# Altium PCB Copy of ADAM202303_FRONTDOOR.PcbDoc
Units mil, origin at the board's own origin, x right, y up, seen from the top; angles counter-clockwise.
Board outline 2480.32 x 2480.32 mil, 2 copper layers (Top Layer, Bottom Layer); 52 components, 39 nets, 181 pads, 44 vias.
Unrouted connection lines stored in the file: 1.
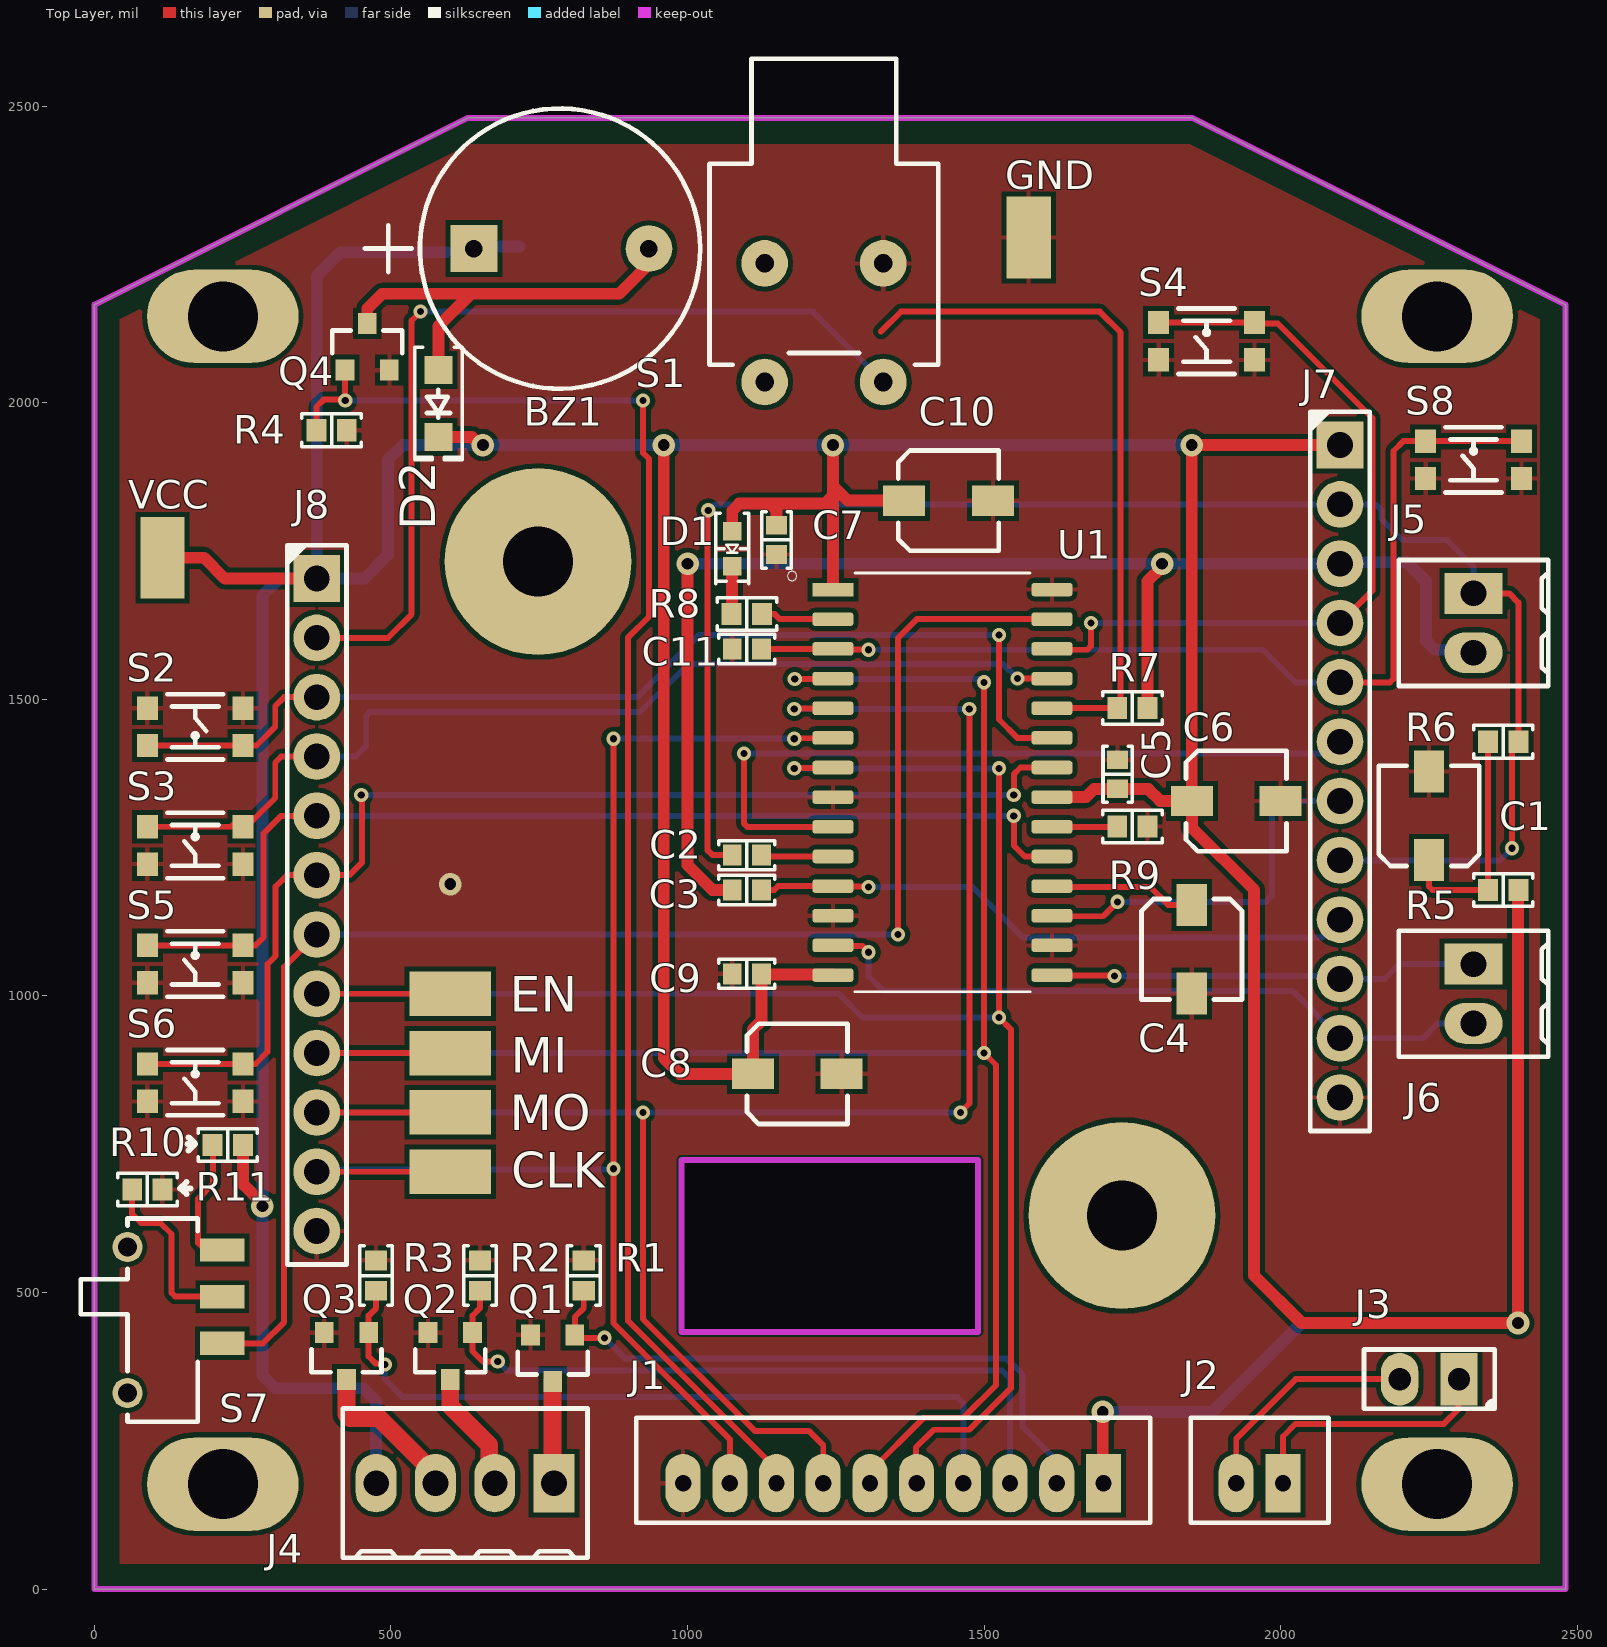
[diagram p0: Top Layer view]
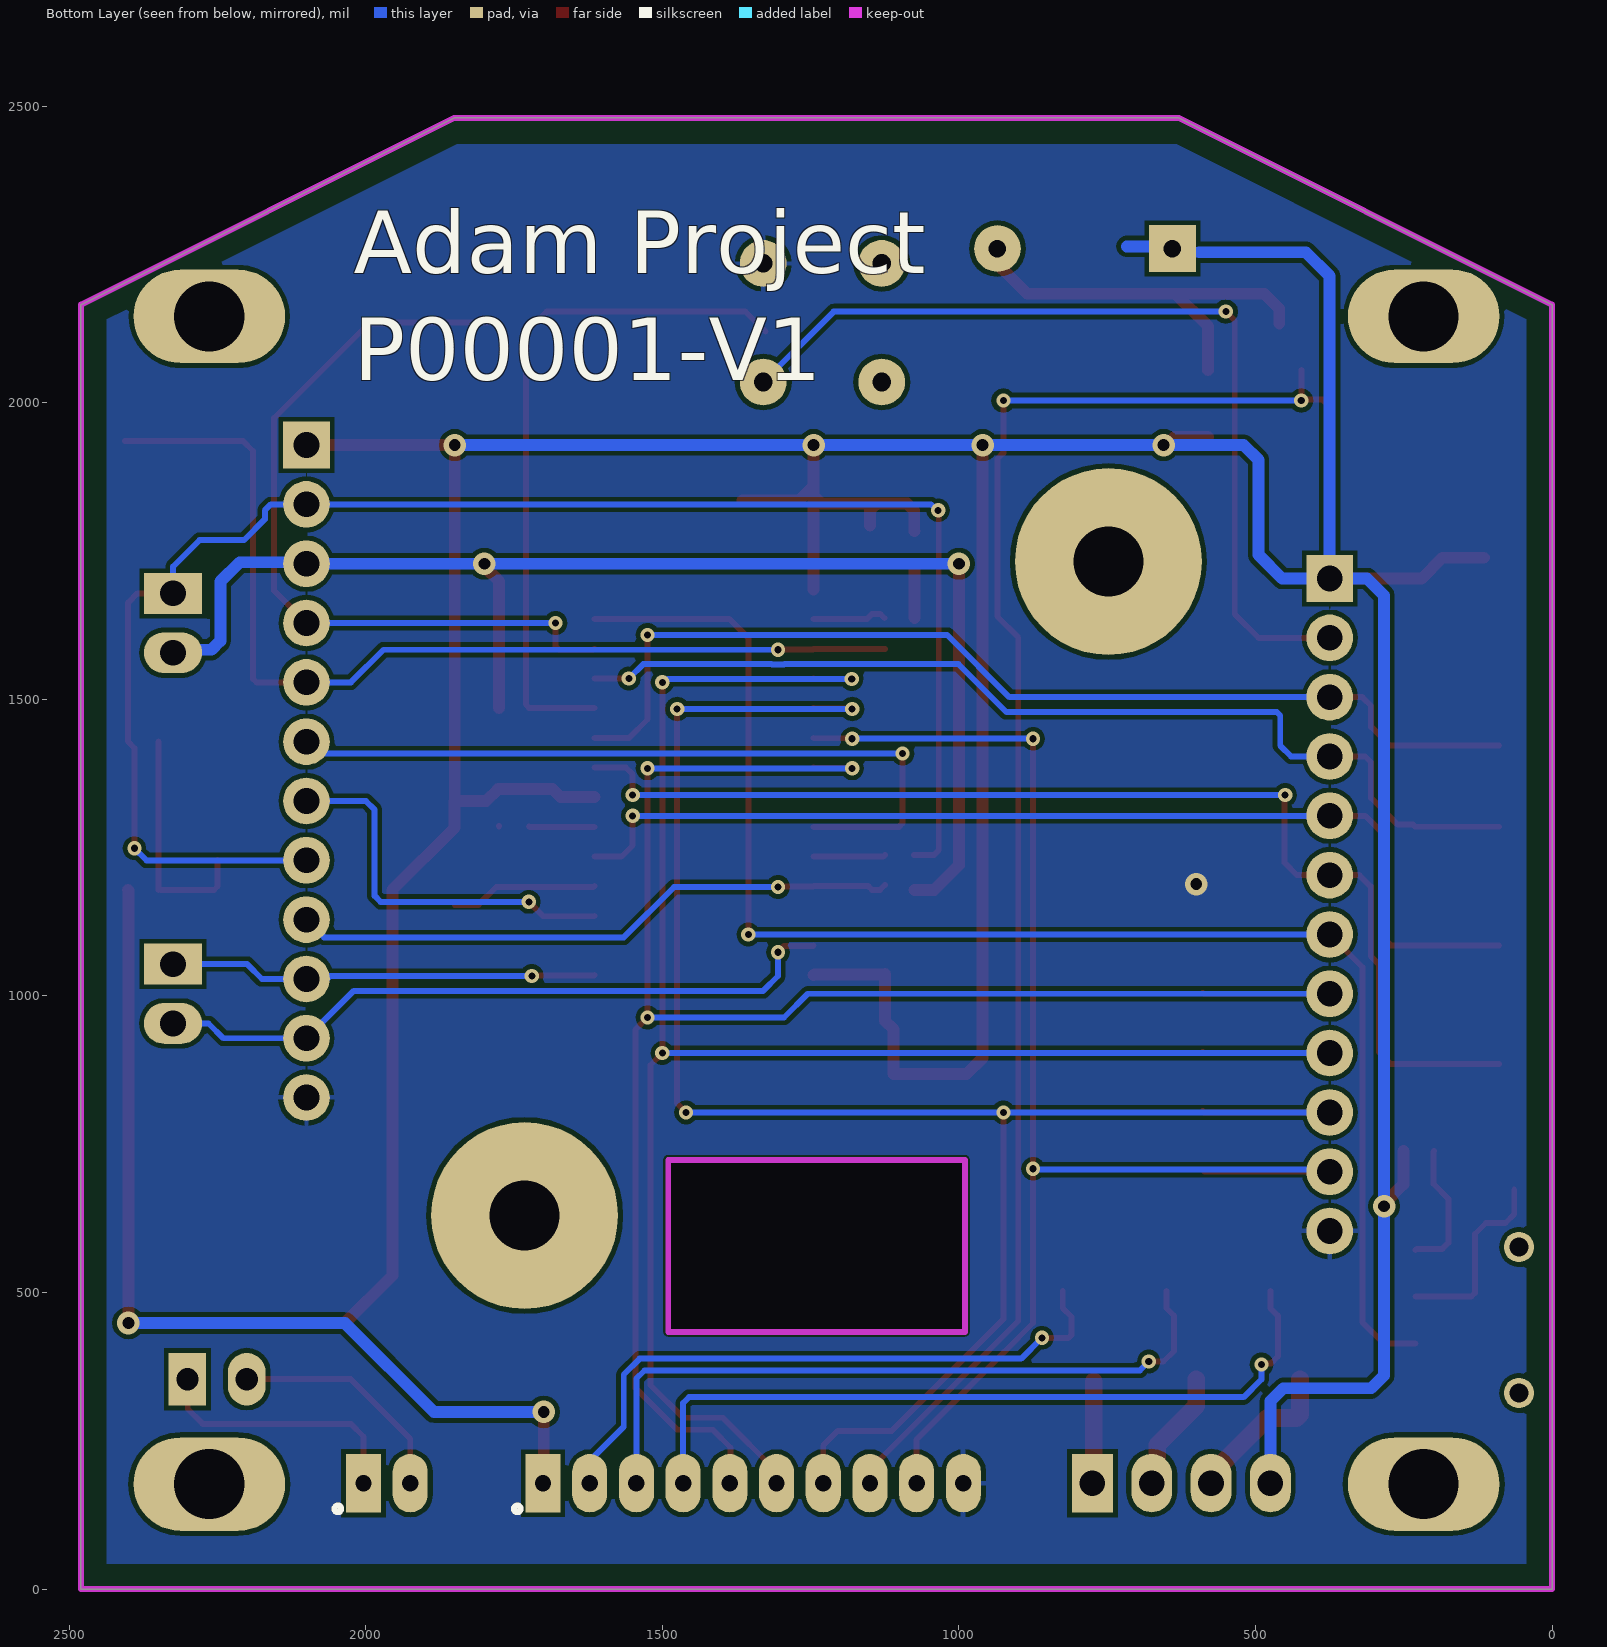
[diagram p1: Bottom Layer view, seen from below]

## Layer stack, top to bottom
Top Solder: solder mask 0.4, Solder Resist, Dk 3.5
Top Layer: signal copper 1.4
Dielectric 1: dielectric 12.6, FR-4, Dk 4.8
Bottom Layer: signal copper 1.4
Bottom Solder: solder mask 0.4, Solder Resist, Dk 3.5

## Board outline
0,0 2480.31,0 2480.31,2165.35 1850.39,2480.31 629.92,2480.31 0,2165.35
cut-out: 990,723.74 990,433.74 1490,433.74 1490,723.74

## Design rules (kind name [scope] priority, off if disabled: settings)
BoardOutlineClearance [All] p1: gap=7.87 ignorepadtopadclearanceinfootprint=FALSE except(0: Arc-OutlineEdge Text-OutlineEdge)
Clearance [All] p1: gap=8 ignorepadtopadclearanceinfootprint=FALSE except(9.84: Arc-Hole Track-Hole SMDPad-Hole THPad-Hole Via-Hole Fill-Hole Poly-Hole Region-Hole Text-Hole)
ComponentClearance [All] p1: gap=5 collisioncheckmode=3 verticalgap=5 showdistances=TRUE
DiffPairsRouting [All] p1: maxlimit=15 minlimit=8 mostfreqgap=8 toplayer_minwidth=8 toplayer_maxwidth=1000 toplayer_prefwidth=8 bottomlayer_minwidth=8 bottomlayer_maxwidth=1000 bottomlayer_prefwidth=8 maxuncoupledlength=500
Height [All] p1: minheight=0 maxheight=71497.94 prefheight=500
HoleSize [All] p1: absolutevalues=TRUE maxlimit=248.03 minlimit=11.81 maxpercent=80.000 minpercent=20.000
HoleToHoleClearance [All] p1: gap=9.84 allowstackedmicrovias=FALSE
MinimumAnnularRing [All] p1: minimumring=3
MinimumSolderMaskSliver [All] p1: minsoldermaskwidth=0
PlaneClearance [All] p1: clearance=8
PlaneConnect PlaneConnectPowerPads [InPadClass('PowerPads')] p1: planeconnectstyle=Direct reliefexpansion=20 reliefentries=4 reliefconductorwidth=10 reliefairgap=10
PlaneConnect [All] p2: pad.planeconnectstyle=Relief pad.reliefexpansion=11.81 pad.reliefentries=4 pad.reliefconductorwidth=8 pad.reliefairgap=8 via.planeconnectstyle=Direct via.reliefexpansion=11.81 via.reliefentries=4 via.reliefconductorwidth=5 via.reliefairgap=5
PolygonConnect PolygonConnectPowerPads [All vs (InPadClass('PowerPads'))] p1: connectstyle=Direct reliefconductorwidth=10 reliefentries=4 polygonreliefangle="90 Angle" airgapwidth=10
PolygonConnect [All] p2: thpad.connectstyle=Relief thpad.reliefconductorwidth=8 thpad.reliefentries=4 thpad.polygonreliefangle="90 Angle" thpad.airgapwidth=8 smdpad.connectstyle=Relief smdpad.reliefconductorwidth=8 smdpad.reliefentries=4 smdpad.polygonreliefangle="90 Angle" smdpad.airgapwidth=8 via.connectstyle=Direct via.reliefconductorwidth=5 via.reliefentries=4 via.polygonreliefangle="90 Angle" via.airgapwidth=5
RoutingVias [All] p1: holewidth=11.81 width=23.62 viastyle="Through Hole" minholewidth=11.81 minwidth=23.62 maxholewidth=23.62 maxwidth=259.84
SilkToSilkClearance [All] p1: silktosilkclearance=0
SilkToSolderMaskClearance [IsPad] p1: minsilkscreentomaskgap=0 clearancetoexposedcopper=TRUE
SolderMaskExpansion [All] p1: expansion=2.95 istentingtop=FALSE
Width [All] p1: maxlimit=1000 minlimit=8 preferedwidth=8 minimp=50.000000 maximp=50.000000 favimp=50.000000
20 further rules are at their usual default settings.

## Classes and differential pairs
component class U_FrontDoorConnecteur: J1 J2 J3
component class "U_Enregistreur et Speaker Audio": C1 C2 C3 C4 C5 C6 C7 C8 C9 C10 C11 D1 J5 J6 J7 J8 R5 R6 R7 R8 R9 R10 R11 S1 S2 S3 S4 S5 S6 S7 S8 U1
component class "U_Buzzer, LED": BZ1 D2 J4 Q1 Q2 Q3 Q4 R1 R2 R3 R4
component class Top-Sheet: CLK EN GND MI MO VCC

## Components (designator, comment, footprint, x,y, rotation, side; value= is the part's Value field where it differs from the comment)
BZ1 "WST-1206BX-17" "BUZZ WST-1206BX" 785,2260 r0 top
C1 "4.7 µF" "CAP ALUM 4.3MM2" 2250,1303.74 r90 top
C2 "0.1 µF" "CAP 0603" 1100.1,1237.35 r180 top
C3 "0.1 µF" "CAP 0603" 1100,1178.74 r180 top
C4 "4.7 µF" "CAP ALUM 4.3MM2" 1850,1078.74 r270 top
C5 "0.1 µF" "CAP 0603" 1725,1373.74 r270 top
C6 "4.7 µF" "CAP ALUM 4.3MM2" 1925,1328.74 r0 top
C7 "0.1 µF" "CAP 0603" 1150,1768.74 r90 top
C8 "4.7 µF" "CAP ALUM 4.3MM2" 1185,868.74 r0 top
C9 "0.1 µF" "CAP 0603" 1100.1,1037.35 r0 top
C10 "4.7 µF" "CAP ALUM 4.3MM2" 1440,1835 r0 top
C11 "0.1 µF" "CAP 0603" 1100,1585.04 r0 top
CLK "TEST POINTS" "TEST POINTS" 600,703.74 r0 top (schematic designator T6)
D1 "Red" "Red Led 0603" 1075,1753.74 r270 top
D2 "1N4007FLTR" SOD123F 580,1998.74 r270 top
EN "TEST POINTS" "TEST POINTS" 600,1003.74 r0 top (schematic designator T3)
GND "TEST POINTS" "TEST POINTS" 1575,2278.74 r270 top (schematic designator T2)
J1 "B10B-PH-K-S(LF)(SN)" "CONN JST 10PIN" 1346.85,178.74 r180 top
J2 "B2B-PH-K-S(LF)(SN)" "CONN JST 2PIN" 1964.37,178.74 r180 top
J3 "SSW-102-03-T-S" "CONN FEM HEADER 2PIN" 2250,353.74 r180 top
J4 "TERM BLK 4P SIDE ENT 2.54MM PCB" "TERM BLOC 4P" 625,178.74 r180 top
J5 "Microphone" "TERM BLOC 2P" 2325,1628.74 r270 top
J6 "Speaker" "TERM BLOC 2P" 2325,1003.74 r270 top
J7 "12P FOOTPRINT" "CONN 12PIN FEMALE" 2100,1379.8 r0 top
J8 "12P FOOTPRINT" "CONN 12PIN FEMALE" 375,1154.8 r0 top
MI "TEST POINTS" "TEST POINTS" 600,903.74 r0 top (schematic designator T5)
MO "TEST POINTS" "TEST POINTS" 600,803.74 r0 top (schematic designator T4)
Q1 "N-CH 30V 5.8A SOT23" "N-CHANNEL TRANS" 810,428.74 r270 top
Q2 "N-CH 30V 5.8A SOT23" "N-CHANNEL TRANS" 637.4,432.48 r270 top
Q3 "N-CH 30V 5.8A SOT23" "N-CHANNEL TRANS" 462.4,432.48 r270 top
Q4 "N-CH 30V 5.8A SOT23" "N-CHANNEL TRANS" 422.6,2055 r90 top
R1 "10K" "RES 0603" 825,528.74 r270 top
R2 "10K" "RES 0603" 650,528.74 r270 top
R3 "10K" "RES 0603" 475,528.74 r270 top
R4 "10K" "RES 0603" 400,1953.74 r180 top
R5 "4.7K" "RES 0603" 2375,1178.74 r0 top
R6 "4.7K" "RES 0603" 2375,1428.74 r180 top
R7 "4.7K" "RES 0603" 1750,1485.73 r180 top
R8 "150R" "RES 0603" 1100,1643.74 r180 top
R9 "80.6K" "RES 0603" 1750,1285.73 r180 top
R10 "100K" "RES 0603" 225,748.74 r0 top
R11 "100K" "RES 0603" 89.41,673.74 r180 top
S1 "AB11AH-HC" "BUTTON AB11AH-HC" 1230,2235 r0 top
S2 "KMR741NG ULC LFS" "Switch Lin SMD" 170,1453.74 r180 top
S3 "KMR741NG ULC LFS" "Switch Lin SMD" 170,1253.74 r0 top
S4 "KMR741NG ULC LFS" "Switch Lin SMD" 1875,2103.74 r0 top
S5 "KMR741NG ULC LFS" "Switch Lin SMD" 170,1053.74 r0 top
S6 "KMR741NG ULC LFS" "Switch Lin SMD" 170,853.74 r0 top
S7 "450405020524" "SL 3Pos Switch" 115,453.74 r90 top
S8 "KMR741NG ULC LFS" "Switch Lin SMD" 2325,1903.74 r0 top
U1 "ISD1760SY" ISD1760SY 1430,1360.73 r0 top
VCC "TEST POINTS" "TEST POINTS" 115,1738.74 r270 top (schematic designator T1)

## Footprints (in the part's own frame and the unit in brackets; to place one, negate y for a bottom-side part, rotate by r counter-clockwise, add the part's x,y. Pads: shape width x height; smd on the part's side, far side on the other; paste and mask are expansions set on the pad)
"BUTTON AB11AH-HC" [mm] "HEAVY BUTTON RED"
  round 2 hole 0.8: 1(2.54,-5.08) 2(2.54,0) 3(-2.54,-5.08) 4(-2.54,0)
  silkscreen extent -4.9,-4.34 4.9,8.76, body extent -4.9,-5.39 4.9,15.08, height 7.07
"BUZZ WST-1206BX" [mm] "Buss WST 1206BX"
  rect 2x2 hole 0.75: 1(-3.683,0)
  round 2 hole 0.75: 2(3.81,0)
  silkscreen extent -8.35,-6 6,6, body extent -6,-6 6,6, height 9.5
"CAP 0603" [mm] "Cap ceramique 0603"
  rect 0.8x0.9 smd: 1(-0.625,0) 2(0.625,0)
  silkscreen extent -1.2,-0.63 1.2,0.63, body extent -0.8,-0.41 0.8,0.41, height 0.82
"CAP ALUM 4.3MM2" [mm]
  rect 1.8x1.3 smd: 1(-1.9,0) 2(1.9,0)
  silkscreen extent -2.15,-2.15 2.15,2.15, body extent -2.3,-2.15 2.3,2.15, height 5.4
"CONN 12PIN FEMALE" [mm] "12 pin female conn 0.5mm spacing"
  rect 2x2 hole 1.1: 1(0,13.943)
  round 2 hole 1.1: 2(0,11.403) 3(0,8.863) 4(0,6.323) 5(0,3.783) 6(0,1.243) 7(0,-1.297) 8(0,-3.837) 9(0,-6.377) 10(0,-8.917) 11(0,-11.457) 12(0,-13.997)
  silkscreen extent -1.27,-15.43 1.27,15.4, body extent -1.25,-15.47 1.25,15.41, height 8.5
"CONN FEM HEADER 2PIN" [mm]
  rect 1.6x2.25 hole 0.95: 1(-1.285,-0.006)
  oval 1.6x2.25 hole 0.95: 2(1.255,-0.006)
  silkscreen extent -2.81,-1.28 2.79,1.26, body extent -2.81,-1.21 2.78,1.2, height 8.51
"CONN JST 2PIN" [mm]
  rect 1.5x2.5 hole 0.7: 1(-1,0)
  oval 1.5x2.5 hole 0.7: 2(1,0)
  silkscreen extent -2.95,-2.8 2.95,1.7, body extent -2.95,-2.8 2.95,1.7, height 6
"CONN JST 10PIN" [mm]
  rect 1.5x2.5 hole 0.7: 1(-9,0)
  oval 1.5x2.5 hole 0.7: 2(-7,0) 3(-5,0) 4(-3,0) 5(-1,0) 6(1,0) 7(3,0) 8(5,0) 9(7,0) 10(9,0)
  silkscreen extent -11,-2.8 11,1.7, body extent -10.95,-2.8 10.95,1.7, height 6
ISD1760SY [mm] "Enregistreur Speaker programable SPI-I2C"
  rect 1.75x0.58 smd: 1(-4.697,8.241)
  rrect40% 1.75x0.58 smd: 2(-4.697,6.971) 3(-4.697,5.701) 4(-4.697,4.431) 5(-4.697,3.161) 6(-4.697,1.891) 7(-4.697,0.621) 8(-4.697,-0.649) 9(-4.697,-1.919) 10(-4.697,-3.189) 11(-4.697,-4.459) 12(-4.697,-5.729) 13(-4.697,-6.999) 14(-4.697,-8.269) 15(4.683,-8.269) 16(4.683,-6.999) 17(4.683,-5.729) 18(4.683,-4.459) 19(4.683,-3.189) 20(4.683,-1.919) 21(4.683,-0.649) 22(4.683,0.621) 23(4.683,1.891) 24(4.683,3.161) 25(4.683,4.431) 26(4.683,5.701) 27(4.683,6.971) 28(4.683,8.241)
  silkscreen extent -6.65,-8.98 3.75,9.02, body extent -5.17,-8.96 5.16,8.94, height 2.65
"N-CHANNEL TRANS" [mm]
  rect 0.9x0.8 smd: 1(0,0) 2(0,-1.9) 3(2,-0.95)
  silkscreen extent 0.72,-2.45 1.7,0.55, body extent -0.34,-2.43 2.17,0.49, height 1.12
"Red Led 0603" [mm] "red led smd"
  rect 0.8x0.8 smd: 1(-0.756,0.008) 2(0.744,0.008)
  silkscreen extent -1.53,-0.69 1.49,0.71, body extent -0.81,-0.39 0.79,0.41, height 0.53
"RES 0603" [mm]
  rect 0.85x0.95 smd: 1(-0.65,0) 2(0.65,0)
  silkscreen extent -1.27,-0.7 1.27,0.7, body extent -0.83,-0.4 0.77,0.4, height 0.45
"SL 3Pos Switch" [mm] "Sliding 3 pos switch"
  rect 1x1.9 smd: 1(3,-2.55) 2(1,-2.55) 3(-1,-2.55)
  round 1.3 hole 0.8: MH(-3.125,1.5) MH(3.125,1.5)
  silkscreen extent -4.35,-1.5 4.35,3.5, body extent -4.45,-3.05 4.45,3.5, height 1.98
SOD123F [mm] "Footprint diode"
  rect 1.2x1.2 smd: 1(-1.427,0) 2(1.433,0)
  silkscreen extent -2.41,-1.02 2.42,1.02, body extent -1.75,-0.8 1.75,0.8, height 1.1
"Switch Lin SMD" [mm]
  rect 0.9x1 smd mask+0.1: 1(-2.05,0.802) 2(2.05,0.802) 3(-2.05,-0.798) 4(2.05,-0.798)
  silkscreen extent -1.2,-1.4 1.2,1.4, body extent -2.3,-1.4 2.3,1.4, height 2.5
"TERM BLOC 2P" [mm]
  rect 1.75x2.5 hole 1.1: 1(-1.27,0)
  oval 1.75x2.5 hole 1.1: 2(1.27,0)
  silkscreen extent -2.7,-3.2 2.7,3.2, body extent -2.77,-3.25 2.77,3.25, height 10
"TERM BLOC 4P" [mm]
  rect 1.75x2.5 hole 1.1: 1(-3.81,0)
  oval 1.75x2.5 hole 1.1: 2(-1.27,0) 3(1.27,0) 4(3.81,0)
  silkscreen extent -5.24,-3.2 5.24,3.2, body extent -5.31,-3.25 5.31,3.25, height 10
"TEST POINTS" [mm]
  rect 3.5x1.9 smd: 1(0,0)
  body extent -1.6,-0.8 1.6,0.8, height 2.01

## Part data
BZ1: "Buzzers Indicator, Internally Driven Magnetic 5 V 30mA 3.1kHz 83dB @ 5V, 10cm Through Hole PC Pins", Supplier Part Number 1=433-1081-ND, ADAM Inventory Number 1=E00001, Manufacturer Part Number 1=WST-1206BX-17, Supplier 1=Digi-Key
C1 C4 C6 C8 C10: library part "CAP ALUM 4.7UF 20% 35V", "CAP ALUM 4.7UF 20% 35V SMD", Device Package="Radial, Can - SMD", Lifetime @ Temp.="1000 Hrs @ 105°C", manufacturer="United Chemi-Con", Manufacturer Part Number 1=EMVE350ADA4R7MD55G, Operating Temperature="-40°C ~ 105°C", Ripple Current @ Low Frequency="16 mA @ 120 Hz", Supplier Part Number 1=661-EMVE350ADA4R7MD5, Tolerance=±20%, Voltage - Rated="35 V", ADAM Inventory Number 1=E00061, Applications="General Purpose", Capacitance="4.7 µF", componentlink1description=Datasheet, componentlink1url=//media.digikey.com/pdf/Data%20Sheets/United%20Chemi-Con%20PDFs/MVE%20Series.pdf, componentlink2description="DigiKey Link", componentlink2url=https://www.digikey.com/en/products/detail/united-chemi-con/EMVE350ADA4R7MD55G/756875, Height - Seated (Max)="0.205\" (5.20mm)", lastupdated="2023-04-04 19:53:03", Lifecycle Status=Active, Minimum Order=1, Mounting Type="Surface Mount", Package / Case="Radial, Can - SMD", packaging=TapeAndReel, Part Status=Active, partid=7039, Polarization=Polar, price=0.06, series="Alchip™- MVE", Size / Dimension="0.157\" Dia (4.00mm)", Supplier 1=Mouser, Surface Mount Land Size="0.169\" L x 0.169\" W (4.30mm x 4.30mm)"
C2 C3 C5 C7 C9 C11: library part "CAP CER 0.1UF 50V X7R 0603", "CAP CER 0.1UF 50V X7R 0603", Device Package="0603 (1608 Metric)", manufacturer=KEMET, Manufacturer Part Number 1=C0603C104K5RAC7411, Operating Temperature="-55°C ~ 125°C", Supplier Part Number 1=399-C0603C104K5RAC7411CT-ND, Temperature Coefficient=X7R, Tolerance=±10%, Voltage - Rated=50V, ADAM Inventory Number 1=E00060, Applications="Bypass, Decoupling", Capacitance="0.1 µF", componentlink1description=Datasheet, componentlink1url=https://api.kemet.com/component-edge/download/datasheet/C0603C104K5RAC7411.pdf, componentlink2description="DigiKey Link", componentlink2url=https://www.digikey.com/en/products/detail/kemet/C0603C104K5RAC7411/3317013, lastupdated="2023-03-28 19:09:05", Lifecycle Status=Active, Minimum Order=1, Mounting Type="Surface Mount, MLCC", Package / Case="0603 (1608 Metric)", packaging=TapeAndReel, Part Status=Active, partid=2233, price=0.01, series="SMD Comm X7R", Size / Dimension="0.063\" L x 0.031\" W (1.60mm x 0.80mm)", Supplier 1=DigiKey, Thickness (Max)="0.035\" (0.90mm)"
CLK EN GND MI MO VCC: "RCWCTE TEST POINTS", Manufacturer Part Number 1=RCWCTE, ADAM Inventory Number 1=E00009
D1: library part "0603 RED LED", "0603 RED LED", Current - Test=20mA, Device Package="0603 (1608 Metric)", Lens Color=Colorless, manufacturer="American Bright Optoelectronics Corporation", Manufacturer Part Number 1=BL-HUB36A-AV-TRB, Millicandela Rating=94mcd, Supplier Device Package=0603, Supplier Part Number 1=BL-HUB36A-AV-TRBCT-ND, Voltage - Forward (Vf) (Typ)=2.2V, ADAM Inventory Number 1=E00069, Color=Red, componentlink1description=Datasheet, componentlink1url=https://americanbrightled.com/pdffiles/smt/BL-HUB36A-AV-TRB.pdf, componentlink2description="DigiKey Link", componentlink2url=https://www.digikey.com/en/products/detail/american-bright-optoelectronics-corporation/BL-HUB36A-AV-TRB/9678174, Configuration=Standard, Height (Max)=0.70mm, lastupdated="2023-03-27 19:53:19", Lens Style="Rectangle with Flat Top", Lens Transparency=Clear, Lifecycle Status=Active, Minimum Order=1, Mounting Type="Surface Mount", Package / Case="0603 (1608 Metric)", packaging=TapeAndReel, Part Status=Active, partid=1020, price=0.04, series=-, Size / Dimension="1.60mm L x 0.80mm W", Supplier 1=DigiKey, Viewing Angle=120°, Wavelength - Dominant=632nm, Wavelength - Peak=645nm
D2: "STANDARD RECTIFIER 1000V SOD-123", Capacitance @ Vr, F="15pF @ 4V, 1MHz", Current - Average Rectified (Io)=1A, Current - Reverse Leakage @ Vr="5µA @ 1000V", manufacturer="SMC Diode Solutions", Package / Case=SOD-123F, Supplier Device Package=SOD-123FL, Supplier Part Number 1=1655-1N4007FLCT-ND, Voltage - DC Reverse (Vr) (Max)=1000V, Voltage - Forward (Vf) (Max) @ If="1.1V @ 1A", componentlink1description=Datasheet, componentlink1url=http://www.smc-diodes.com/propdf/1N4001FL-1N4007FL%20N1646%20REV.A.pdf, componentlink2description="DigiKey Link", componentlink2url=http://digikey.com/product-detail/en/smc-diode-solutions/1N4007FLTR/1655-1N4007FLCT-ND/11657827, Diode Type=Standard, lastupdated="2020-08-30 20:59:55", Lifecycle Status=Active, Manufacturer Part Number 1=1N4007FLTR, Minimum Order=1, Mounting Type="Surface Mount", packaging=TapeAndReel, partid=3314, price=0.01, Speed="Standard Recovery >500ns, > 200mA (Io)", Supplier 1=DigiKey
J1: library part "CONN JST 10POS TH", "CONN HEADER VERT 10POS 2MM", Current Rating (Amps)=2A, Insulation Color=Natural, manufacturer="JST Sales America Inc.", Material Flammability Rating="UL94 V-0", Operating Temperature="-25°C ~ 85°C", Supplier Part Number 1=455-1712-ND, Voltage Rating=100V, ADAM Inventory Number 1=E00053, componentlink1description=Datasheet, componentlink1url=http://www.jst-mfg.com/product/pdf/eng/ePH.pdf, componentlink2description="DigiKey Link", componentlink2url=http://digikey.com/product-detail/en/jst-sales-america-inc/B10B-PH-K-S-LF-SN/455-1712-ND/926619, Connector Type=Header, Contact Finish - Mating=Tin, Contact Finish - Post=Tin, Contact Length - Mating="0.130\" (3.30mm)", Contact Length - Post="0.134\" (3.40mm)", Contact Material=Brass, Contact Shape=Square, Contact Type="Male Pin", Fastening Type="Detent Lock", Insulation Height="0.236\" (6.00mm)", Insulation Material="Polyamide (PA66), Nylon 6/6", lastupdated="2020-01-12 22:31:09", Lifecycle Status=Active, Manufacturer Part Number 1=B10B-PH-K-S(LF)(SN), Minimum Order=1, Mounting Type="Through Hole", Number of Positions=10, Number of Positions Loaded=All, Number of Rows=1, Overall Contact Length="0.333\" (8.45mm)", packaging=Bulk, Part Status=Active, partid=33, Pitch - Mating="0.079\" (2.00mm)", price=0.46, series=PH, Shrouding="Shrouded - 4 Wall", Style="Board to Cable/Wire", Supplier 1=DigiKey, Termination="Press-Fit, Solder"
J2: library part "CONN JST 2PIN TH", "CONN HEADER VERT 2POS 2MM", Current Rating (Amps)=2A, Insulation Color=Natural, manufacturer="JST Sales America Inc.", Material Flammability Rating="UL94 V-0", Operating Temperature="-25°C ~ 85°C", Supplier Part Number 1=455-1704-ND, Voltage Rating=100V, ADAM Inventory Number 1=E00051, componentlink1description=Datasheet, componentlink1url=http://www.jst-mfg.com/product/pdf/eng/ePH.pdf, componentlink2description="DigiKey Link", componentlink2url=http://digikey.com/product-detail/en/jst-sales-america-inc/B2B-PH-K-S-LF-SN/455-1704-ND/926611, Connector Type=Header, Contact Finish - Mating=Tin, Contact Finish - Post=Tin, Contact Length - Mating="0.130\" (3.30mm)", Contact Length - Post="0.134\" (3.40mm)", Contact Material=Brass, Contact Shape=Square, Contact Type="Male Pin", Fastening Type="Detent Lock", Insulation Height="0.236\" (6.00mm)", Insulation Material="Polyamide (PA66), Nylon 6/6", lastupdated="2020-01-03 23:40:58", Lifecycle Status=Active, Manufacturer Part Number 1=B2B-PH-K-S(LF)(SN), Minimum Order=1, Mounting Type="Through Hole", Number of Positions=2, Number of Positions Loaded=All, Number of Rows=1, Overall Contact Length="0.333\" (8.45mm)", packaging=Bulk, Part Status=Active, partid=11, Pitch - Mating="0.079\" (2.00mm)", price=0.17, series=PH, Shrouding="Shrouded - 4 Wall", Style="Board to Cable/Wire", Supplier 1=DigiKey, Termination="Press-Fit, Solder"
J3: library part "CONN FEM HEADER 2POS", "CONN RCPT 2POS 0.1 TIN", Current Rating (Amps)="5.7A per Contact", Insulation Color=Black, manufacturer="Samtec Inc.", Material Flammability Rating="UL94 V-0", Operating Temperature="-55°C ~ 105°C", Supplier Part Number 1=SSW-102-03-T-S-ND, ADAM Inventory Number 1=E00055, componentlink2description="DigiKey Link", componentlink2url=http://digikey.com/product-detail/en/samtec-inc/SSW-102-03-T-S/SSW-102-03-T-S-ND/7873010, Connector Type=Receptacle, Contact Finish - Mating=Tin, Contact Finish - Post=Tin, Contact Type=Forked, Fastening Type=Push-Pull, lastupdated="2022-06-21 15:06:02", Lifecycle Status=Active, Manufacturer Part Number 1=SSW-102-03-T-S, Minimum Order=1, Mounting Type="Through Hole", Number of Positions=2, Number of Positions Loaded=All, Number of Rows=1, packaging=Bulk, Part Status=Active, price=0.53, series=SSW, Style="Board to Board or Cable", Supplier 1=DigiKey, Termination=Solder
J4: Color=Green, Current=10A, manufacturer="TE Connectivity AMP Connectors", Manufacturer Part Number 1=282834-4, Supplier Part Number 1=A98335-ND, Voltage=150V, ADAM Inventory Number 1=E00010, componentlink1description=Datasheet, componentlink1url=https://www.te.com/commerce/DocumentDelivery/DDEController?Action=srchrtrv&DocNm=282834&DocType=Customer+Drawing&DocLang=English, componentlink2description="DigiKey Link", componentlink2url=http://digikey.com/product-detail/en/te-connectivity-amp-connectors/282834-4/A98335-ND/1153265, lastupdated="2020-01-15 04:16:05", Lifecycle Status=Active, Mating Orientation="Horizontal with Board", Minimum Order=1, Mounting Type="Through Hole", Number of Levels=1, packaging=Bulk, Part Status=Active, Pitch="0.100\" (2.54mm)", Positions Per Level=4, price=2.68, series=Buchanan, Supplier 1=DigiKey, Wire Gauge="16-30 AWG", Wire Termination="Screw - Rising Cage Clamp"
J5 J6: library part "TERM BLK 2P SIDE ENT 2.54MM PCB", "TERM BLK 2P SIDE ENT 2.54MM PCB", Color=Green, Current=10A, manufacturer="TE Connectivity AMP Connectors", Manufacturer Part Number 1=282834-2, Supplier Part Number 1=A98333-ND, Voltage=150V, ADAM Inventory Number 1=E00011, componentlink1description=Datasheet, componentlink1url=https://www.te.com/commerce/DocumentDelivery/DDEController?Action=srchrtrv&DocNm=282834&DocType=Customer+Drawing&DocLang=English, componentlink2description="DigiKey Link", componentlink2url=http://digikey.com/product-detail/en/te-connectivity-amp-connectors/282834-2/A98333-ND/1150135, lastupdated="2020-01-15 04:15:38", Lifecycle Status=Active, Mating Orientation="Horizontal with Board", Minimum Order=1, Mounting Type="Through Hole", Number of Levels=1, packaging=Bulk, Part Status=Active, Pitch="0.100\" (2.54mm)", Positions Per Level=2, price=0.88, series=Buchanan, Supplier 1=DigiKey, Wire Gauge="16-30 AWG", Wire Termination="Screw - Rising Cage Clamp"
J7 J8: "FOOTPRINT FOR TEST OR JUST IN CASE", Current Rating (Amps)=3A, Insulation Color=Black, manufacturer="Harwin Inc.", Manufacturer Part Number 1=PPTC121LFBN-RC, Material Flammability Rating="UL94 V-0", Operating Temperature="-40°C ~ 105°C", Supplier Part Number 1=S6100-ND, ADAM Inventory Number 1=E00074, componentlink1description=Datasheet, componentlink1url=https://cdn.harwin.com/pdfs/C001XX_M20_Series_Connectors.pdf, componentlink2description="DigiKey Link", componentlink2url=http://digikey.com/product-detail/en/harwin-inc/M20-7821242/952-1852-ND/3727819, Connector Type=Receptacle, Contact Finish - Mating=Gold, Contact Finish - Post=Tin, Contact Finish Thickness - Mating=Flash, Contact Type="Female Socket", Fastening Type=Push-Pull, lastupdated="2022-09-21 18:59:31", Lifecycle Status=Active, Mated Stacking Heights="11.04mm, 12.63mm", Minimum Order=5004, Mounting Type="Through Hole", Number of Positions=12, Number of Positions Loaded=All, Number of Rows=1, packaging=Tube, Part Status=Active, price=0.74, series=M20, Style="Board to Board or Cable", Supplier 1=Digi-Key, Termination=Solder
Q1 Q2 Q3 Q4: library part "TRANS N-CHANNEL 30V 5.8A SOT23", "N-Channel 5.8A (Tj) 350mW Surface Mount SOT-23", manufacturer=MCC, Manufacturer Part Number 1=SI3404-TP, Supplier Part Number 1=DMN3051LDICT-ND, ADAM Inventory Number 1=E00008, Component Type=Transistors, Design Item ID="TRANS N-CHANNEL 30V 5.8A SOT23", Source=IC_Component.SchLib, Supplier 1=Digi-Key
R1 R2 R3 R4: library part "RES SMD 10K OHM", "RES SMD 10K OHM 1% 1/10W 0603", Device Package="0603 (1608 Metric)", manufacturer="Rohm Semiconductor", Manufacturer Part Number 1=RC0603FR-0710KL, Operating Temperature="-55°C ~ 155°C", Power (Watts)="0.25W, 1/4W", Ratings=AEC-Q200, Supplier Device Package=0603, Supplier Part Number 1=3349388, Temperature Coefficient=±100ppm/°C, Tolerance=±1%, ADAM Inventory Number 1=E00021, componentlink1description=Datasheet, componentlink1url=https://www.rohm.com/datasheet/ESR01MZPF/esr-e, componentlink2description="DigiKey Link", componentlink2url=https://www.digikey.com/en/products/detail/rohm-semiconductor/ESR03EZPF1002/1983429, Composition="Thick Film", Features="Automotive AEC-Q200, Pulse Withstanding", Height - Seated (Max)="0.022\" (0.55mm)", lastupdated="2023-03-27 19:26:49", Lifecycle Status=Active, Minimum Order=1, Number of Terminations=2, Package / Case="0603 (1608 Metric)", packaging=TapeAndReel, Part Status=Active, partid=5466, price=0.02, Resistance=10K, series=ESR, Size / Dimension="0.063\" L x 0.031\" W (1.60mm x 0.80mm)", Supplier 1="Future Electronics"
R5 R6 R7: library part "RES SMD 4.7K OHM", "RES 4.7K OHM 1% 1/10W 0603", Device Package="0603 (1608 Metric)", manufacturer="Stackpole Electronics Inc", Manufacturer Part Number 1=RC0603FR-074K7L, Operating Temperature="-55°C ~ 155°C", Power (Watts)="0.1W, 1/10W", Ratings=AEC-Q200, Supplier Device Package=0603, Supplier Part Number 1=311-4.70KHRCT-ND, Temperature Coefficient=±100ppm/°C, Tolerance=±1%, ADAM Inventory Number 1=E00025, componentlink1description=Datasheet, componentlink1url=https://www.seielect.com/catalog/sei-rmcf_rmcp.pdf, componentlink2description="DigiKey Link", componentlink2url=https://www.digikey.com/en/products/detail/stackpole-electronics-inc/RMCF0603FT4K70/1760998, Composition="Thick Film", Features="Automotive AEC-Q200", Height - Seated (Max)="0.022\" (0.55mm)", lastupdated="2023-04-04 19:29:43", Lifecycle Status=Active, Minimum Order=1, Number of Terminations=2, Package / Case="0603 (1608 Metric)", packaging=CutTape, Part Status=Active, partid=6078, price=0.01, Resistance=4.7K, series=RMCF, Size / Dimension="0.061\" L x 0.031\" W (1.55mm x 0.80mm)", Supplier 1=Digi-Key
R8: library part "RES SMD 150 OHM", "RES SMD 150 OHM 0.1% 1/8W 0603", Device Package="0603 (1608 Metric)", manufacturer="Vishay Beyschlag", Manufacturer Part Number 1=RC0603FR-07150RL, Operating Temperature="-55°C ~ 155°C", Power (Watts)="0.125W, 1/8W", Ratings=AEC-Q200, Supplier Device Package=0603, Supplier Part Number 1=1201284, Temperature Coefficient=±25ppm/°C, Tolerance=±0.1%, ADAM Inventory Number 1=E00020, componentlink1description=Datasheet, componentlink1url=http://www.vishay.com/docs/28785/mcat_pre.pdf, componentlink2description="DigiKey Link", componentlink2url=http://digikey.com/product-detail/en/vishay-beyschlag/MCT0603MD1500BP100/MCT0603-150-MBCT-ND/2092134, Composition="Thin Film", Features="Anti-Sulfur, Automotive AEC-Q200", Height - Seated (Max)="0.022\" (0.55mm)", lastupdated="2023-04-04 19:29:46", Lifecycle Status=Active, Minimum Order=1, Number of Terminations=2, Package / Case="0603 (1608 Metric)", packaging=TapeAndReel, Part Status=Active, partid=5246, price=0.23, Resistance=150R, series="MCT AT - Precision", Size / Dimension="0.061\" L x 0.033\" W (1.55mm x 0.85mm)", Supplier 1="Future Electronics"
R9: library part "RES SMD 80.6K OHM", "RES SMD 80.6K OHM 1% 1/4W 0603", Device Package="0603 (1608 Metric)", manufacturer="Vishay Dale", Manufacturer Part Number 1=ERJ-3EKF8062V, Operating Temperature="-55°C ~ 155°C", Power (Watts)="0.25W, 1/4W", Ratings=AEC-Q200, Supplier Device Package=0603, Supplier Part Number 1=63W0948, Temperature Coefficient=±100ppm/°C, Tolerance=±1%, ADAM Inventory Number 1=E00015, componentlink1description=Datasheet, componentlink1url=https://www.vishay.com/docs/20065/rcse3.pdf, componentlink2description="DigiKey Link", componentlink2url=https://www.digikey.com/en/products/detail/vishay-dale/RCS060380K6FKEA/5868691, Composition="Thick Film", Features="Automotive AEC-Q200, Pulse Withstanding", Height - Seated (Max)="0.020\" (0.50mm)", lastupdated="2023-04-04 19:27:58", Lifecycle Status=Active, Minimum Order=1, Number of Terminations=2, Package / Case="0603 (1608 Metric)", packaging=TapeAndReel, Part Status=Active, partid=62631, price=0.02, Resistance=80.6K, series="RCS e3", Size / Dimension="0.061\" L x 0.033\" W (1.55mm x 0.85mm)", Supplier 1=Newark
R10 R11: library part "RES SMD 100K OHM", "RES SMD 100K OHM 1% 1/4W 0603", Device Package="0603 (1608 Metric)", manufacturer="Vishay Dale", Manufacturer Part Number 1=RC0603FR-07100KL, Operating Temperature="-55°C ~ 155°C", Power (Watts)="0.25W, 1/4W", Ratings=AEC-Q200, Supplier Device Package=0603, Supplier Part Number 1=3697448, Temperature Coefficient=±100ppm/°C, Tolerance=±1%, ADAM Inventory Number 1=E00022, componentlink1description=Datasheet, componentlink1url=http://www.vishay.com/docs/20065/rcse3.pdf, componentlink2description="DigiKey Link", componentlink2url=https://www.digikey.com/en/products/detail/vishay-dale/RCS0603100KFKEA/5866946, Composition="Thick Film", Features="Automotive AEC-Q200, Pulse Withstanding", Height - Seated (Max)="0.020\" (0.50mm)", lastupdated="2023-03-27 19:26:49", Lifecycle Status=Active, Minimum Order=1, Number of Terminations=2, Package / Case="0603 (1608 Metric)", packaging=TapeAndReel, Part Status=Active, partid=5363, price=0.02, Resistance=100K, series="RCS e3", Size / Dimension="0.061\" L x 0.033\" W (1.55mm x 0.85mm)", Supplier 1="Future Electronics"
S1: "SWITCH PUSH SPST-NO 0.4VA 28V", Color - Actuator/Cap=Red, Current Rating (Amps)="0.4VA (AC/DC)", manufacturer="NKK Switches", Operating Temperature="-30°C ~ 85°C", Supplier Part Number 1=360-2604-ND, Voltage Rating - AC=28V, Actuator Type="Round, Button", ADAM Inventory Number 1=E00066, Circuit=SPST-NO, componentlink1description=Datasheet, componentlink1url=https://www.nkkswitches.com/pdf/Apushbuttons.pdf, componentlink2description="DigiKey Link", componentlink2url=http://digikey.com/product-detail/en/nkk-switches/AB11AH-HC/360-2604-ND/1056046, Features="Sealed - Fully", lastupdated="2020-01-25 20:05:42", Lifecycle Status=Active, Manufacturer Part Number 1=AB11AH-HC, Minimum Order=1, Mounting Type="Through Hole, Right Angle", packaging=Tray, Part Status=Active, price=5.00, series=AB, Supplier 1=DigiKey, Switch Function=Off-Mom, Termination Style="PC Pin", Type=Standard, Voltage Rating - DC=28V
S2 S3 S4 S5 S6 S8: library part "Sw Lin", "SWITCH TACTILE SPST-NO 50MA 32V", Contact Rating @ Voltage="0.05A @ 32VDC", manufacturer=C&K, Operating Force=400gf, Operating Temperature="-40°C ~ 85°C", Supplier Part Number 1=CKN10688CT-ND, Actuator Height off PCB, Vertical=2.50mm, Actuator Orientation="Top Actuated", Actuator Type=Standard, ADAM Inventory Number 1=E00012, Circuit=SPST-NO, componentlink1description=Datasheet, componentlink1url=https://dznh3ojzb2azq.cloudfront.net/products/Tactile/KMR7/documents/datasheet.pdf, componentlink2description="DigiKey Link", componentlink2url=http://digikey.com/product-detail/en/c-k/KMR741NG-ULC-LFS/CKN10688CT-ND/6035360, Illumination=Non-Illuminated, Ingress Protection="IP67 - Dust Tight, Waterproof", lastupdated="2020-04-09 10:01:05", Lifecycle Status=Active, Manufacturer Part Number 1="KMR741NG ULC LFS", Minimum Order=1, Mounting Type="Surface Mount", Outline="4.20mm x 2.80mm", packaging=TapeAndReel, Part Status=Active, price=0.16, series=KMR7, Supplier 1=DigiKey, Switch Function=Off-Mom, Termination Style="Gull Wing"
S7: library part "SLIDE SWIT", "SMT 8.7 X 3.0 MM MINI SLIDE SWIT", Current Rating (Amps)="300mA (DC)", manufacturer="Würth Elektronik", Operating Temperature="-40°C ~ 85°C", Rated Current=300mA, Rated Voltage=5VDC, Supplier Part Number 1=732-450405020524CT-ND, Voltage Rating - DC="5 V", Actuator Length=2.00mm, Actuator Type=Standard, ADAM Inventory Number 1=E00013, Circuit=SPDT, componentlink1description=Datasheet, componentlink1url=https://www.we-online.com/catalog/datasheet/450405020524.pdf, componentlink2description="DigiKey Link", componentlink2url=https://www.digikey.com/en/products/detail/würth-elektronik/450405020524/11627297, Contact Finish=Silver, Contact Material="Copper Alloy", Contact Plating=Silver, Contact Timing="Non-Shorting (BBM)", lastupdated="2022-06-20 13:21:27", Lifecycle Status=Active, Manufacturer Part Number 1=450405020524, Minimum Order=1, Mounting Technology=SMT, Mounting Type="Surface Mount", packaging=TapeAndReel, Part Status=Active, partid=4, price=0.73, Published Date="November 2019", Publisher="Wurth Elektronik", series=WS-SLSU, Size=8.7x3mm, Supplier 1=DigiKey, Switch Function=On-On, Switching Function=On-On, Terminal Material="Copper Alloy", Terminal Plating=Silver, Termination Style="SMD (SMT) Tab"
U1: "Voice Record/Playback IC Multiple Message 40 ~ 120 Sec Pushbutton, SPI 28-SOIC", Supplier Part Number 1=ISD1760SY-ND, ADAM Inventory Number 1=E00041, Manufacturer Part Number 1=ISD1760SY, Supplier 1=Digi-Key

## Free pads (board coordinates)
  oval 255.91x157.48 hole 118.11: " "(216.54,177.17) " "(216.54,2145.67) " "(2263.78,177.17) " "(2263.78,2145.67)
  round 314.96 hole 118.11: " "(748.03,1732.28) " "(1732.28,629.92)

## Via types
v1: diameter 24, hole 12, Top Layer to Bottom Layer, 34 vias
v2: diameter 38, hole 20, Top Layer to Bottom Layer, 10 vias

## Nets (pads, with @x,y where several pads share a name; then routed paths per layer and width w, separated by ;. In a path a pad name is that pad's centre, name@x,y a point inside that pad or via, vN(x,y) a via of type N, cw(c..) or ccw(c..) an arc to the next point about the centre after c; other vN are vias at no path point)
+5V: BZ1.1 C5.2 C6.1 C7.2 C8.1 C9.2 C10.1 D1.1 D2.2 J1.1 J4.4 J7.1 J8.1 R5.2 R10.2 U1.1 U1.14 U1.21 VCC.1 | length 10866.7
  Top Layer w20: VCC.1 185,1738.74 220,1703.74 J8.1 ; R10.2@250.59,738.74 250.77,738.56 250.77,682.35 283.34,649.77 v2(283.34,645.62) ; D2.2 636.55,1942.32 650.13,1928.74 v2(655,1928.74) ; v2(960,1928.74) 960,895.46 986.72,868.74 C8.1 1110.2,943.54 1124.71,958.06 C9.2 1125.79,1036.26 1243.99,1036.26 U1.14 ; D1.1@1075.15,1783.67 D1.1 1075.31,1818.28 1087.02,1830 1231.41,1830 1245.08,1843.66 ; 1140,1828.74 1150,1818.74 C7.2 ; v2(1245,1928.74) 1245.08,1928.66 1245.08,1860 ; U1.1 1245.08,1843.66 ; C10.1 1270.08,1835 1245.08,1860 ; U1.21 1671.44,1335.18 1685,1348.74 1776.94,1348.74 1796.74,1328.94 C6.1@1850,1328.94 ; v2(1700,298.74) 1700,179.92 J1.1 ; J7.1 v2(1850,1928.74) C6.1@1850,1328.94 ; R5.2 2400,1178.15 v2(2400,448.74) 2035,448.74 1955,528.74 1955,1178.74 1850.2,1283.54 C6.1 C6.1@1850,1328.94 ; 1245.08,1843.66 1245.08,1860
  Bottom Layer w20: J4.4 475,317.02 453.28,338.74 305,338.74 283.34,360.4 v2(283.34,645.62) 283.34,1675.08 312.01,1703.74 J8.1 ; 595,2253.74 415,2253.74 375,2213.74 J8.1 ; BZ1.1@640,2263.74 717.05,2263.74 ; v2(1700,298.74) 1885,298.74 2035,448.74 v2(2400,448.74) ; v2(1850,1928.74) 1385,1928.74 v2(1245,1928.74) v2(960,1928.74) v2(655,1928.74) 520,1928.74 495,1903.74 495,1743.74 455,1703.74 J8.1
AnaIn: J7.6 U1.9 | length 1283.5
  Top Layer w10: v1(1095,1408.74) 1095,1291.04 1100.86,1285.18 U1.9
  Bottom Layer w10: v1(1095,1408.74) 2070.05,1408.74 2090.05,1428.74 J7.6
AUD/AUX: J7.7 U1.17 | length 651.5
  Top Layer w10: U1.17 1615.09,1134.46 1700.72,1134.46 v1(1725,1158.74)
  Bottom Layer w10: v1(1725,1158.74) 1975,1158.74 1985,1168.74 1985,1313.94 1999.8,1328.74 J7.7
"E/S EN": EN.1 J1.5 J8.8 U1.7 | length 3106.9
  Top Layer w10: J8.8 588,1003.74 EN.1@589,1004.74 ; v1(1180,1383.74) 1180.72,1384.46 1244.36,1384.46 U1.7 ; J1.5 1385,179.96 1385,238.74 1415,268.74 1475,268.74 1545,338.74 1545,943.74 v1(1525,963.74) v1(1525,1383.74)
  Bottom Layer w10: J8.8 1255,1003.74 1295,963.74 v1(1525,963.74) ; v1(1180,1383.74) v1(1525,1383.74)
ERASE: J8.4 S3.1 S3.2 U1.25 | length 1714.2
  Top Layer w10: S3.1 230.72,1285.31 234.15,1288.74 260,1288.74 305,1333.74 305,1393.74 315,1403.74 J8.4 ; v1(1556.44,1535.18) U1.25
  Bottom Layer w10: J8.4 440,1403.74 458.33,1422.07 458.33,1472.88 464.19,1478.74 920,1478.74 1000.72,1559.46 1293.93,1559.46 1294.64,1558.74 1315.36,1558.74 1316.07,1559.46 1532.16,1559.46 v1(1556.44,1535.18)
FT: J8.6 S6.1 S6.2 U1.22 | length 1975.9
  Top Layer w10: S6.1 S6.2 271.57,885.31 292.01,905.75 292.01,1053.74 305.5,1067.23 305.5,1184.24 325,1203.74 J8.6 430,1203.74 450.86,1224.6 450.86,1337.88 v1(450,1338.74) ; v1(1550,1338.74) 1550,1373.74 1561.44,1385.18 U1.22
  Bottom Layer w10: v1(450,1338.74) v1(1550,1338.74)
FWD: J7.4 S4.1 S4.2 U1.26 | length 1322.7
  Top Layer w10: U1.26 1615.81,1583.74 1674.14,1583.74 1680,1589.6 v1(1680,1628.74) ; S4.1 S4.2 1957.29,2133.74 1994.95,2133.74 2154.37,1974.32 2154.37,1683.11 J7.4
  Bottom Layer w10: v1(1680,1628.74) J7.4
GND: C1.2 C4.2 C5.1 C6.2 C7.1 C8.2 C9.1 C10.2 C11.1 GND.1 J1.10 J7.12 J8.12 Q1.2 Q2.2 Q3.2 Q4.2 R1.1 R2.1 R3.1 R4.1 R9.1 R11.1 S1.2 S2.3 S2.4 S3.3 S3.4 S4.3 S4.4 S5.3 S5.4 S6.3 S6.4 S8.3 S8.4 U1.8 U1.12 U1.16 U1.28 | length 0.8
  Top Layer w10: R9.1@1775,1286.32 R9.1
  other v2: 600,1188.74
INT_READY: J8.7 S7.3 U1.27 | length 2533.1
  Top Layer w10: S7.3@230.39,414.37 284.14,414.37 320,450.23 320,1048.74 J8.7 ; v1(1355,1103.74) 1355,1603.74 1386.44,1635.18 U1.27
  Bottom Layer w10: J8.7 v1(1355,1103.74)
LED_B_CTRL: J1.4 Q3.1 R3.2 | length 1300.9
  Top Layer w10: R3.2 475,473.74 462.4,461.14 Q3.1 462.4,392.15 474.28,380.27 488.47,380.27 v1(490,378.74)
  Bottom Layer w10: v1(490,378.74) 490,353.74 520,323.74 1455,323.74 1464.96,313.78 J1.4
LED_G_CTRL: J1.3 Q2.1 R2.2 | length 1208.8
  Top Layer w10: R2.2 650,473.74 637.4,461.14 Q2.1 637.4,401.34 655,383.74 v1(680,383.74)
  Bottom Layer w10: v1(680,383.74) 695,368.74 1530,368.74 1543.7,355.04 J1.3
LED_R_CTRL: J1.2 Q1.1 R1.2 | length 1070.3
  Top Layer w10: R1.2 825,473.74 810,458.74 Q1.1 815,423.74 v1(860,423.74)
  Bottom Layer w10: v1(860,423.74) 895,388.74 1538.28,388.74 1565,362.02 1565,273.74 1622.44,216.3 J1.2
MIC+: C2.2 J5.1 J7.2 J7.8 R6.1 | length 2808.8
  Top Layer w10: v1(1035,1818.74) 1034,1817.74 1034,1245.6 1042.25,1237.35 C2.2 ; J5.1 2385,1678.74 2400.59,1663.15 R6.1 2390,1418.15 v1(2390,1249.13)
  Bottom Layer w10: v1(1035,1818.74) 1037.16,1818.74 1047.16,1828.74 2160,1828.74 2170,1818.74 2170,1803.74 2205,1768.74 2280,1768.74 2325,1723.74 J5.1 ; J7.8 2369.61,1228.74 v1(2390,1249.13)
MIC-: C3.1 J7.9 U1.11 | length 1029.8
  Top Layer w10: C3.1@1124.71,1187.35 1133.32,1178.74 1146.19,1178.74 1152.63,1185.18 U1.11 1245.8,1184.46 1304.28,1184.46 v1(1305,1183.74)
  Bottom Layer w10: v1(1305,1183.74) 1480,1183.74 1565,1098.74 2070,1098.74 J7.9
MISO: J1.6 J8.9 MI.1 U1.4 | length 3211.5
  Top Layer w10: J8.9 587.33,903.74 MI.1@589,905.41 ; v1(1180.72,1534.46) 1244.36,1534.46 U1.4 ; J1.6 1307.48,198.43 1398.03,288.98 1464.96,288.98 1520,344.02 1520,883.74 v1(1500,903.74) v1(1500,1528.74)
  Bottom Layer w10: J8.9 v1(1500,903.74) ; v1(1180.72,1534.46) 1490.49,1534.46 1496.21,1528.74 v1(1500,1528.74)
MOSI: J1.7 J8.10 MO.1 U1.5 | length 3150.9
  Top Layer w10: J8.10 586.67,803.74 MO.1@589,806.07 ; v1(925,803.74) 925,455.31 1113.28,267.02 1204.2,267.02 1228.74,242.48 J1.7 ; v1(1180,1483.74) 1180.72,1484.46 1244.36,1484.46 U1.5 ; v1(1460,803.74) 1475,818.74 v1(1475,1483.74)
  Bottom Layer w10: J8.10 v1(925,803.74) v1(1460,803.74) ; v1(1180,1483.74) v1(1475,1483.74)
NetBZ1_2: BZ1.2 D2.1 Q4.3 | length 699.8
  Top Layer w20: Q4.3 460,2158.74 485,2183.74 635,2183.74 ; D2.1 580,2128.74 635,2183.74 ; BZ1.2@927.96,2253.74 927.96,2226.7 885,2183.74 635,2183.74
NetC1_1: C1.1 R5.1 R6.2 | length 391.8
  Top Layer w10: C1.1 2250,1184.6 2255.86,1178.74 R5.1@2345,1178.74 ; R5.1 R6.2
NetC2_1: C2.1 U1.10 | length 121.3
  Top Layer w10: C2.1 1126.88,1235.18 U1.10
NetC4_1: C4.1 U1.18 | length 248.7
  Top Layer w10: U1.18 1615.81,1183.74 1780,1183.74 1810.2,1153.54 C4.1
NetD1_2: D1.2 R8.2 | length 87.4
  Top Layer w20: R8.2@1074.51,1637.35 1074.91,1637.75 1074.91,1724.06 D1.2
NetJ1_8: J1.8 Q4.1 R4.2 | length 2594.3
  Top Layer w10: R4.2 374.41,1993.15 386.53,2005.27 421.47,2005.27 v1(423,2003.74) 422.6,2004.14 Q4.1 ; v1(925,2003.74) 925,1915.66 935,1905.66 935,1639.56 900,1604.56 900,452.02 1150,202.02 J1.8
  Bottom Layer w10: v1(423,2003.74) v1(925,2003.74)
NetJ2_1: J2.1 J3.1 | length 444.6
  Top Layer w10: J2.1 2003.74,257.48 2025,278.74 2275,278.74 2300,303.74 2300,353.39 J3.1
NetJ2_2: J2.2 J3.2 | length 392.1
  Top Layer w10: J2.2 1925,253.74 2025.24,353.98 J3.2
NetJ4_1: J4.1 Q1.3 | length 172.3
  Top Layer w30: Q1.3 772.6,181.14 J4.1
NetJ4_2: J4.2 Q2.3 | length 206.1
  Top Layer w30: Q2.3 600,308.74 665.79,242.95 665.79,187.95 J4.2
NetJ4_3: J4.3 Q3.3 | length 265.8
  Top Layer w30: Q3.3 425,294.6 430.86,288.74 479.76,288.74 575,193.5 J4.3
NetR8_1: R8.1 U1.2 | length 125.6
  Top Layer w10: R8.1@1125.69,1637.35 1132.08,1643.74 1146.86,1643.74 1155.42,1635.18 U1.2
NetR9_2: R9.2 U1.20 | length 110.3
  Top Layer w10: U1.20 1723.86,1285.18 R9.2
NetR10_1: R10.1 S7.1 | length 225.9
  Top Layer w10: R10.1@199.41,738.74 200,738.15 200,683.19 175,658.19 175,583.74 185,573.74 228.5,573.74 S7.1@230.39,571.85
NetR11_2: R11.2 S7.2 | length 323.8
  Top Layer w10: R11.2 63.82,632.13 78.58,617.36 111.38,617.36 130,598.74 130,499.6 135.86,493.74 229.76,493.74 S7.2@230.39,493.11
PLAY: J8.3 S2.1 S2.2 U1.23 | length 1778.4
  Top Layer w10: S2.2 S2.1 273.43,1422.17 305,1453.74 305,1488.74 320,1503.74 J8.3 ; v1(1525,1608.74) 1525,1466.04 1555.86,1435.18 U1.23
  Bottom Layer w10: J8.3 915,1503.74 1020,1608.74 v1(1525,1608.74)
REC: J8.2 R7.2 S1.1 U1.24 | length 2699.5
  Top Layer w10: J8.2 495,1603.74 535,1643.74 535,2138.74 v1(550,2153.74) ; 1326.41,2120.34 1359.8,2153.74 1695,2153.74 1730,2118.74 1730,1491.32 R7.2 1723.86,1485.18 U1.24
  Bottom Layer w10: v1(550,2153.74) 1211.26,2153.74 S1.1
RST: C11.2 J7.5 S8.1 S8.2 U1.3 | length 1698
  Top Layer w10: C11.2 1124.75,1585.18 U1.3 1245.8,1584.46 1304.28,1584.46 v1(1305,1583.74) ; J7.5 2184.14,1528.74 2190,1534.6 2190,1918.74 2206.57,1935.31 S8.1 S8.2
  Bottom Layer w10: v1(1305,1583.74) 1970,1583.74 2025,1528.74 J7.5
SCL/CLK: CLK.1 J1.9 J8.11 U1.6 | length 2424.3
  Top Layer w10: J8.11 586,703.74 CLK.1@589,706.74 ; v1(875,1433.74) v1(875,708.74) 875,448.74 924.06,399.68 1022.19,301.55 1071.26,252.48 J1.9 ; v1(1180,1433.74) 1180.72,1434.46 1244.36,1434.46 U1.6
  Bottom Layer w10: J8.11 378.47,707.21 873.47,707.21 v1(875,708.74) ; v1(875,1433.74) v1(1180,1433.74)
SP+: J6.1 J7.10 U1.15 | length 723.7
  Top Layer w10: U1.15 1615.09,1034.46 1719.28,1034.46 v1(1720,1033.74)
  Bottom Layer w10: v1(1720,1033.74) 2060,1033.74 2065,1028.74 J7.10 2175,1028.74 2200,1053.74 J6.1
SP-: J6.2 J7.11 U1.13 | length 1178.7
  Top Layer w10: U1.13 1245.8,1084.46 1294.52,1084.46 1305,1073.98 v1(1305,1073.74)
  Bottom Layer w10: v1(1305,1073.74) 1305,1033.74 1330,1008.74 2020,1008.74 J7.11 2240,928.74 2265,953.74 J6.2
VIA1: C3.2 J5.2 J7.3 R7.1 | length 2302.1
  Top Layer w20: v2(1000,1728.74) 1000,1220.46 1041.72,1178.74 C3.2 ; R7.1 1775.3,1486.03 1775.3,1699.16 1800,1723.87 v2(1800,1728.74)
  Bottom Layer w20: v2(1000,1728.74) 2097.5,1728.74 2100,1731.24 2212.5,1731.24 2245,1698.74 2245,1598.74 2260,1583.74 2320,1583.74 J5.2
VOL: J8.5 S5.1 S5.2 U1.19 | length 1775.7
  Top Layer w10: S5.1 S5.2 271.57,1085.31 285.5,1099.24 285.5,1274.24 315,1303.74 J8.5 ; v1(1550,1303.74) 1550,1253.74 1568.56,1235.18 U1.19
  Bottom Layer w10: J8.5 v1(1550,1303.74)
pads on no net: S1.3 S1.4 S7.MH

## Polygon pours and split planes (outlines as drawn)
GND on Bottom Layer "BOT_GND" (solid, remove dead copper, pour order 0): 2450,30 2450,2148.74 2190,2278.74 1850,2448.74 629.92,2448.74 30,2148.74 30,30
GND on Top Layer "BOT_GND" (solid, remove dead copper, pour order 1): 629.92,2448.74 30,2148.74 30,30 2450,30 2450,2148.74 2190,2278.74 1850,2448.74

## Keep-outs
Keep-Out Layer:
  lines w10: 0,0 2480.31,0 2480.31,2165.35 1850.39,2480.31 629.92,2480.31 0,2165.35 0,0 ; 990,433.74 1490,433.74 1490,723.74 990,723.74 990,433.74

## Silkscreen, mask and mechanical layers (free items; w line width, h text height)
Top Overlay:
  lines w10: 155.28,666.52 144.56,675.74 ; 155.28,686.46 144.56,675.74 ; 157,750.74 169.85,750.74 ; 159,739.74 169.85,750.59 169.85,750.74 ; 159,761.59 169.85,750.74 ; 162,675.74 144.56,675.74
Bottom Overlay:
  text "Adam Project / P00001-V1" at 2020,2003.74 h180